# Altium PCB KBV1.3_mod.PcbDoc
Units mil, origin at the board's own origin, x right, y up, seen from the top; angles counter-clockwise.
Board outline 11250.06 x 3738.1 mil, 2 copper layers (Top Layer, Bottom Layer); 151 components, 147 nets, 722 pads, 52 vias.
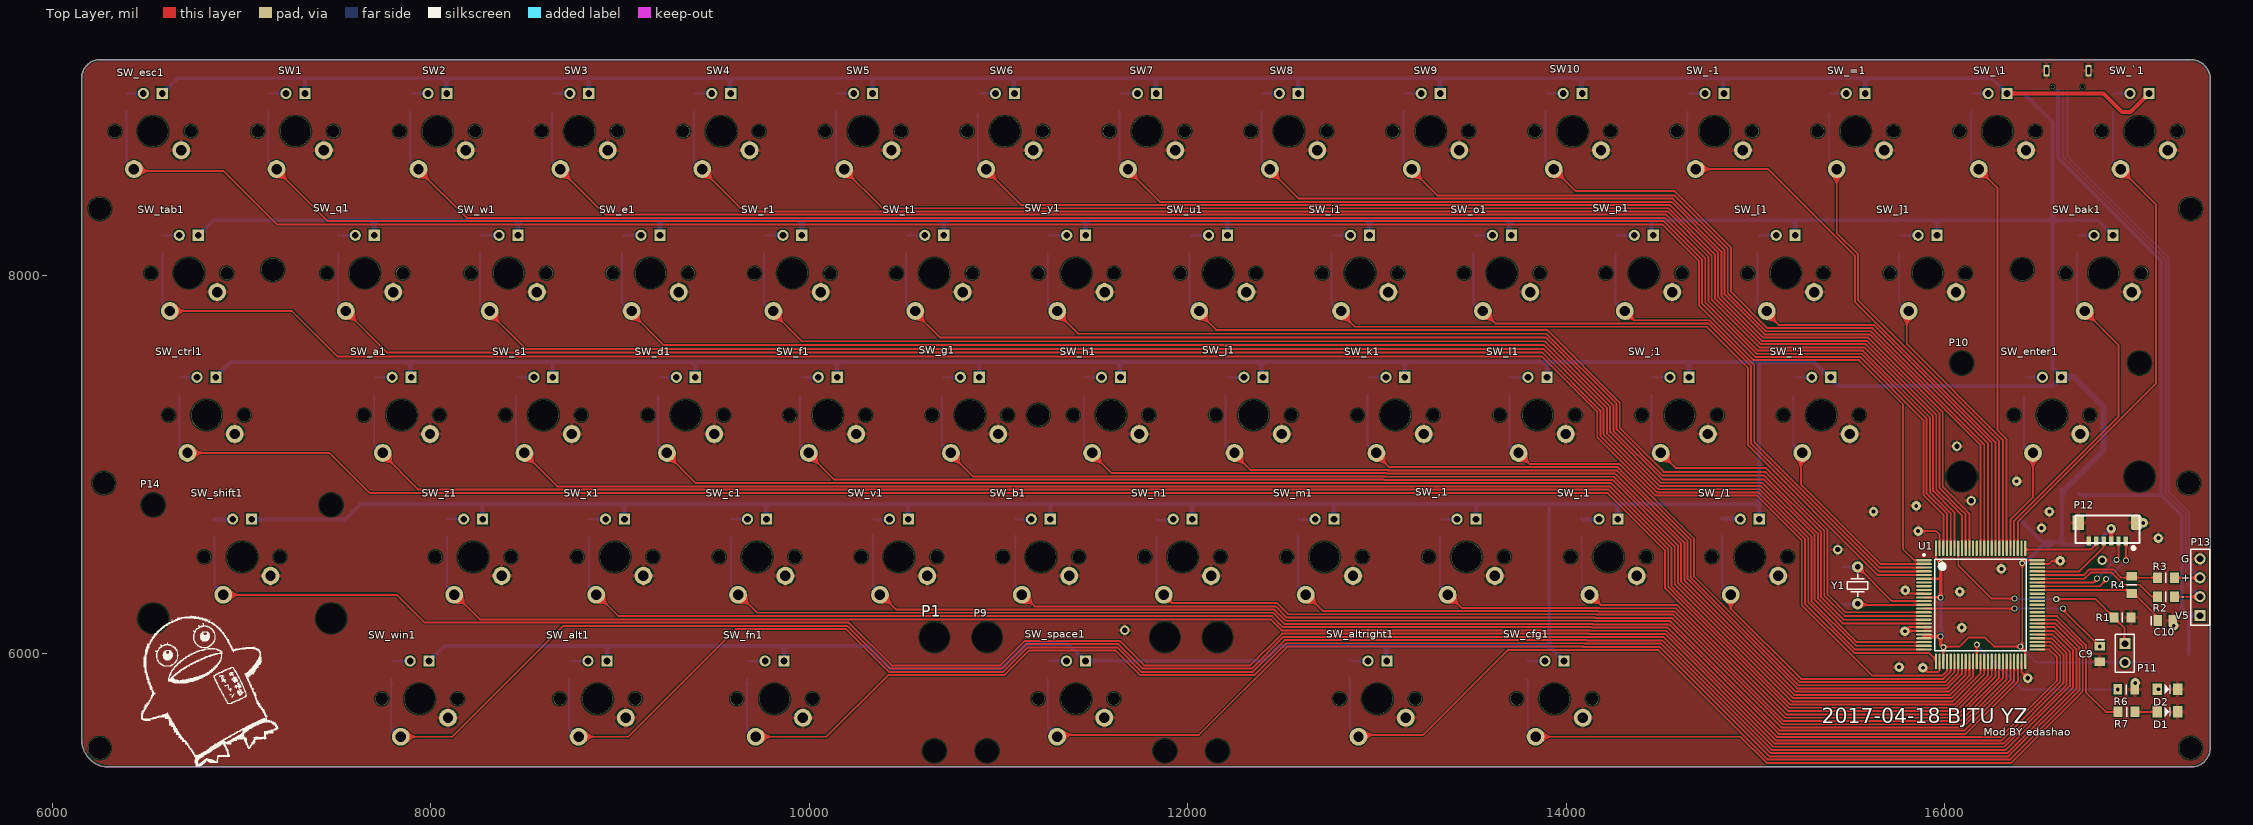
[diagram p0: Top Layer view]
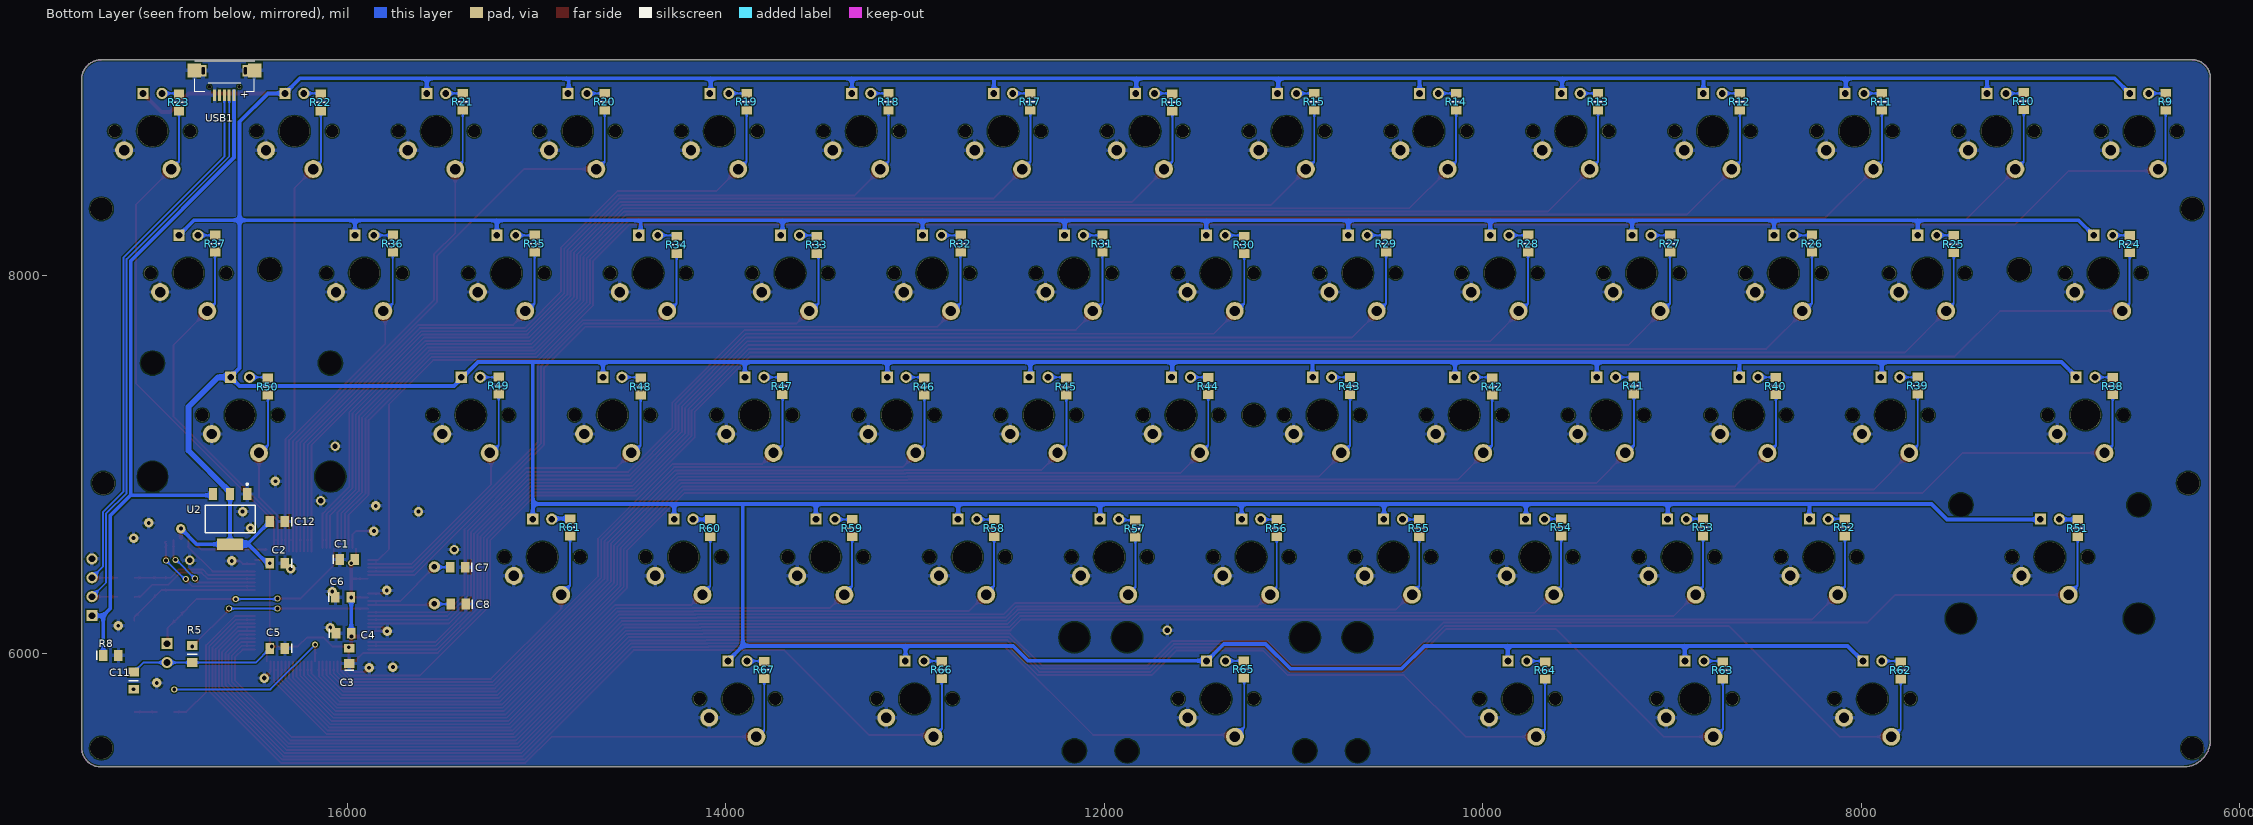
[diagram p1: Bottom Layer view, seen from below]

## Layer stack, top to bottom
Top Solder: solder mask 0.4, Solder Resist, Dk 3.5
Top Layer: signal copper 1.4
Dielectric1: dielectric 12.6, FR-4, Dk 4.8
Bottom Layer: signal copper 1.4
Bottom Solder: solder mask 0.4, Solder Resist, Dk 3.5

## Board outline
6154.04,5540 6154.04,9042.15 cw(c6250,9042.15) 6250,9138.1 17300,9138.1 cw(c17300,9034) 17404.1,9034 17404.1,5500 cw(c17302.05,5502.05) 17300,5400 6300,5400 cw(c6297.02,5542.98)

## Design rules (kind name [scope] priority, off if disabled: settings)
Clearance [All] p1: gap=7 ignorepadtopadclearanceinfootprint=FALSE except(0: Arc-Hole Track-Hole SMDPad-Hole THPad-Hole Via-Hole Fill-Hole Poly-Hole Region-Hole Text-Hole)
ComponentClearance [All] p1: gap=0 collisioncheckmode=3 verticalgap=0 showdistances=FALSE
HoleSize [All] p1: absolutevalues=TRUE maxlimit=300 minlimit=0 maxpercent=80.000 minpercent=20.000
MinimumSolderMaskSliver [All] p1: minsoldermaskwidth=1
PlaneConnect [All] p1: planeconnectstyle=Relief reliefexpansion=20 reliefentries=4 reliefconductorwidth=20 reliefairgap=10
PolygonConnect [All] p1: connectstyle=Relief reliefconductorwidth=20 reliefentries=4 polygonreliefangle="90 Angle" airgapwidth=10
RoutingVias [All] p1: holewidth=28 width=50 viastyle="Through Hole" minholewidth=2 minwidth=5 maxholewidth=280 maxwidth=500
SilkToSilkClearance [All] p1: silktosilkclearance=0
SilkToSolderMaskClearance SilkscreenOverComponentPads [IsPad] p1: minsilkscreentomaskgap=0 clearancetoexposedcopper=TRUE
SolderMaskExpansion [All] p1: expansion=4
Width [All] p1: maxlimit=1000 minlimit=10 preferedwidth=20 minimp=50.000000 maximp=50.000000 favimp=50.000000
24 further rules are at their usual default settings.

## Classes and differential pairs
component class main: P1 P9 P10 R9 R10 R11 R12 R13 R14 R15 R16 R17 R18 R19 R20 R21 R22 R23 R24 R25 R26 R27 R28 R29 R30 R31 R32 R33 R34 R35 R36 R37 R38 R39 R40 R41 R42 R43 R44 R45 R46 R47 R48 R49 R50 R51 R52 R53 R54 R55 R56 R57 R58 R59 R60 R61 R62 R63 R64 R65 R66 R67 SW1 SW2 SW3 SW4 SW5 SW6 SW7 SW8 SW9 SW10 "SW_\"1" SW_,1 SW_-1 SW_.1 SW_/1 SW_;1 SW_=1 SW_[1 SW_\1 SW_]1 SW_`1 SW_a1 SW_alt1 SW_altright1 SW_b1 SW_bak1 SW_c1 SW_cfg1 SW_ctrl1 SW_d1 SW_e1 SW_enter1 SW_esc1 SW_f1 SW_fn1 SW_g1 SW_h1 SW_i1 SW_j1 SW_k1 SW_l1 SW_m1 SW_n1 SW_o1 SW_p1 SW_q1 SW_r1 SW_s1 SW_shift1 SW_space1 SW_t1 SW_tab1 SW_u1 SW_v1 SW_w1 SW_win1 SW_x1 SW_y1 SW_z1
component class STM32F103VE: C1 C2 C3 C4 C5 C6 C7 C8 C9 C10 C11 C12 D1 D2 P11 P12 P13 R1 R2 R3 R4 R5 R6 R7 R8 U1 U2 USB1 Y1

## Components (designator, comment, footprint, x,y, rotation, side; value= is the part's Value field where it differs from the comment)
C1 "Cap" CAP0805(2512) 16000,6497 r180 bottom
C2 "Cap" CAP0805(2512) 16370,6477 r0 bottom
C3 "Cap" CAP0805(2512) 15990,5987 r90 bottom
C4 "Cap" CAP0805(2512) 16020,6107 r180 bottom
C5 "Cap" CAP0805(2512) 16370,6027 r0 bottom
C6 "Cap" CAP0805(2512) 16023,6297 r180 bottom
C7 "Cap" CAP0805(2512) 15417,6456 r0 bottom
C8 "Cap" CAP0805(2512) 15414,6261 r0 bottom
C9 "Cap" CAP0805(2512) 16820,5997 r270 top
C10 "Cap" CAP0805(2512) 17166,6174 r0 top
C11 "Cap Pol2" CAP0805(2512) 17250,5990 r180 bottom
C12 "Cap" CAP0805(2512) 16370,6697 r0 bottom
D1 "LED0" DIODE_100mil 17178,5691 r180 top
D2 "LED0" DIODE_100mil 17178,5811 r180 top
P1 "卫星轴" 1x3 11409,5760 r180 top
P9 "卫星轴" 1x2 11409,5760 r180 top
P10 "卫星轴" 1x2 16560,7260 r0 top
P11 "下载时暂时短路再上电" HDR1X2 16953,6052 r270 top
P12 "SH1.0-6P 立贴" SH1.0-6P立 16860,6640 r180 top
P13 "Header 4" HDR1X4 17350,6200 r90 top
P14 "卫星轴" 1x2 7002,6510 r0 top (schematic designator P9)
R1 "Res2" RES0805(2012M) 16940,6190 r0 top
R2 "Res Semi" RES0805(2012M) 17170,6300 r180 top
R3 "Res Semi" RES0805(2012M) 17170,6400 r180 top
R4 "Res Semi" RES0805(2012M) 16989,6363 r90 top
R5 "Res Semi" RES0805(2012M) 16820,5997 r90 bottom
R6 "Res2" RES0805(2012M) 16960,5810 r180 top
R7 "Res2" RES0805(2012M) 16962,5691 r0 top
R8 "Res2" RES0805(2012M) 17130,5856 r270 bottom
R9 "Res2" RES0805(2012M) 6390,8916 r270 bottom
R10 "Res2" RES0805(2012M) 7140,8919 r270 bottom
R11 "Res2" RES0805(2012M) 7890,8916 r270 bottom
R12 "Res2" RES0805(2012M) 8640,8916 r270 bottom
R13 "Res2" RES0805(2012M) 9390,8916 r270 bottom
R14 "Res2" RES0805(2012M) 10140,8916 r270 bottom
R15 "Res2" RES0805(2012M) 10890,8916 r270 bottom
R16 "Res2" RES0805(2012M) 11640,8913 r270 bottom
R17 "Res2" RES0805(2012M) 12390,8916 r270 bottom
R18 "Res2" RES0805(2012M) 13140,8916 r270 bottom
R19 "Res2" RES0805(2012M) 13890,8916 r270 bottom
R20 "Res2" RES0805(2012M) 14640,8916 r270 bottom
R21 "Res2" RES0805(2012M) 15390,8916 r270 bottom
R22 "Res2" RES0805(2012M) 16140,8913 r270 bottom
R23 "Res2" RES0805(2012M) 16890,8913 r90 bottom
R24 "Res2" RES0805(2012M) 6579,8163 r270 bottom
R25 "Res2" RES0805(2012M) 7509,8163 r270 bottom
R26 "Res2" RES0805(2012M) 8259,8166 r270 bottom
R27 "Res2" RES0805(2012M) 9009,8166 r270 bottom
R28 "Res2" RES0805(2012M) 9759,8166 r270 bottom
R29 "Res2" RES0805(2012M) 10509,8166 r270 bottom
R30 "Res2" RES0805(2012M) 11260,8160 r270 bottom
R31 "Res2" RES0805(2012M) 12009,8166 r270 bottom
R32 "Res2" RES0805(2012M) 12759,8166 r270 bottom
R33 "Res2" RES0805(2012M) 13520,8160 r270 bottom
R34 "Res2" RES0805(2012M) 14260,8160 r270 bottom
R35 "Res2" RES0805(2012M) 15009,8166 r270 bottom
R36 "Res2" RES0805(2012M) 15759,8166 r270 bottom
R37 "Res2" RES0805(2012M) 16698,8166 r270 bottom
R38 "Res2" RES0805(2012M) 6669,7413 r270 bottom
R39 "Res2" RES0805(2012M) 7701,7416 r270 bottom
R40 "Res2" RES0805(2012M) 8451,7413 r270 bottom
R41 "Res2" RES0805(2012M) 9201,7416 r270 bottom
R42 "Res2" RES0805(2012M) 9950,7410 r270 bottom
R43 "Res2" RES0805(2012M) 10701,7413 r270 bottom
R44 "Res2" RES0805(2012M) 11451,7413 r270 bottom
R45 "Res2" RES0805(2012M) 12200,7410 r270 bottom
R46 "Res2" RES0805(2012M) 12950,7410 r270 bottom
R47 "Res2" RES0805(2012M) 13701,7413 r270 bottom
R48 "Res2" RES0805(2012M) 14450,7410 r270 bottom
R49 "Res2" RES0805(2012M) 15201,7416 r270 bottom
R50 "Res2" RES0805(2012M) 16420,7410 r270 bottom
R51 "Res2" RES0805(2012M) 6855,6663 r270 bottom
R52 "Res2" RES0805(2012M) 8085,6666 r270 bottom
R53 "Res2" RES0805(2012M) 8835,6666 r270 bottom
R54 "Res2" RES0805(2012M) 9585,6666 r270 bottom
R55 "Res2" RES0805(2012M) 10335,6663 r270 bottom
R56 "Res2" RES0805(2012M) 11088,6663 r270 bottom
R57 "Res2" RES0805(2012M) 11835,6660 r270 bottom
R58 "Res2" RES0805(2012M) 12582,6663 r270 bottom
R59 "Res2" RES0805(2012M) 13332,6663 r270 bottom
R60 "Res2" RES0805(2012M) 14082,6663 r270 bottom
R61 "Res2" RES0805(2012M) 14823,6666 r270 bottom
R62 "Res2" RES0805(2012M) 7790,5910 r270 bottom
R63 "Res2" RES0805(2012M) 8730,5910 r270 bottom
R64 "Res2" RES0805(2012M) 9670,5910 r270 bottom
R65 "Res2" RES0805(2012M) 11262,5916 r270 bottom
R66 "Res2" RES0805(2012M) 12858,5913 r270 bottom
R67 "Res2" RES0805(2012M) 13797,5913 r270 bottom
SW1 "" MX_SW-5 7284,8760 r0 top
SW2 "" MX_SW-5 8034,8760 r0 top
SW3 "" MX_SW-5 8784,8760 r0 top
SW4 "" MX_SW-5 9534,8760 r0 top
SW5 "" MX_SW-5 10284,8760 r0 top
SW6 "" MX_SW-5 11034,8760 r0 top
SW7 "" MX_SW-5 11784,8760 r0 top
SW8 "" MX_SW-5 12534,8760 r0 top
SW9 "" MX_SW-5 13284,8760 r0 top
SW10 "" MX_SW-5 14034,8760 r0 top
"SW_\"1" "" MX_SW-5 15348,7260 r0 top
SW_,1 "" MX_SW-5 13473,6510 r0 top
SW_-1 "" MX_SW-5 14784,8760 r0 top
SW_.1 "" MX_SW-5 14223,6510 r0 top
SW_/1 "" MX_SW-5 14970,6510 r0 top
SW_;1 "" MX_SW-5 14599,7260 r0 top
SW_=1 "" MX_SW-5 15530,8760 r0 top
SW_[1 "" MX_SW-5 15160,8010 r0 top
SW_\1 "" MX_SW-5 16280,8760 r0 top
SW_]1 "" MX_SW-5 15910,8010 r0 top
SW_`1 "" MX_SW-5 17030,8760 r0 top
SW_a1 "" MX_SW-5 7845,7260 r0 top
SW_alt1 "" MX_SW-5 8880,5760 r0 top
SW_altright1 "" MX_SW-5 13002,5760 r0 top
SW_b1 "" MX_SW-5 11223,6510 r0 top
SW_bak1 "" MX_SW-5 16840,8010 r0 top
SW_c1 "" MX_SW-5 9723,6510 r0 top
SW_cfg1 "" MX_SW-5 13938,5760 r0 top
SW_ctrl1 "" MX_SW-5 6813,7260 r0 top
SW_d1 "" MX_SW-5 9347,7260 r0 top
SW_e1 "" MX_SW-5 9160,8010 r0 top
SW_enter1 "" MX_SW-5 16567,7260 r0 top
SW_esc1 "" MX_SW-5 6530,8760 r0 top
SW_f1 "" MX_SW-5 10097,7260 r0 top
SW_fn1 "" MX_SW-5 9816,5760 r0 top
SW_g1 "" MX_SW-5 10848,7260 r0 top
SW_h1 "" MX_SW-5 11594,7260 r0 top
SW_i1 "" MX_SW-5 12910,8010 r0 top
SW_j1 "" MX_SW-5 12347,7260 r0 top
SW_k1 "" MX_SW-5 13097,7260 r0 top
SW_l1 "" MX_SW-5 13848,7260 r0 top
SW_m1 "" MX_SW-5 12723,6510 r0 top
SW_n1 "" MX_SW-5 11973,6510 r0 top
SW_o1 "" MX_SW-5 13660,8010 r0 top
SW_p1 "" MX_SW-5 14410,8010 r0 top
SW_q1 "" MX_SW-5 7650,8010 r0 top
SW_r1 "" MX_SW-5 9910,8010 r0 top
SW_s1 "" MX_SW-5 8594,7260 r0 top
SW_shift1 "" MX_SW-5 7002,6510 r0 top
SW_space1 "" MX_SW-5 11409,5760 r0 top
SW_t1 "" MX_SW-5 10660,8010 r0 top
SW_tab1 "" MX_SW-5 6720,8010 r0 top
SW_u1 "" MX_SW-5 12160,8010 r0 top
SW_v1 "" MX_SW-5 10473,6510 r0 top
SW_w1 "" MX_SW-5 8410,8010 r0 top
SW_win1 "" MX_SW-5 7940,5760 r0 top
SW_x1 "" MX_SW-5 8973,6510 r0 top
SW_y1 "" MX_SW-5 11410,8010 r0 top
SW_z1 "" MX_SW-5 8223,6510 r0 top
U1 "STM32F103VET6" LQFP-100 16190,6257 r0 top locked
U2 "REG1117-3.3" ZZ311 16620,6710 r0 bottom
USB1 "USB" MICRO-USB 16650,9060 r0 bottom
Y1 "XTAL" XTAL_0.4 15540,6360 r90 top

## Footprints (in the part's own frame and the unit in brackets; to place one, negate y for a bottom-side part, rotate by r counter-clockwise, add the part's x,y. Pads: shape width x height; smd on the part's side, far side on the other; paste and mask are expansions set on the pad)
1x2 [mil]
  round 0 hole 120: 0(-470,275) 3(470,275)
  round 0 hole 157: 1(-470,-325) 4(470,-325)
1x3 [mil]
  round 0 hole 120: 0(-748.03,275) 3(748.03,275)
  round 0 hole 157: 1(-748.03,-325) 4(748.03,-325)
CAP0805(2512) [mm]
  rect 1.15x1.45 smd: 1(-1.016,0) 2(1.016,0)
  silkscreen extent -1.9,-0.6 -1.9,0.6, body extent -1.1,-0.72 1.1,0.72, height 1.4
DIODE_100mil [mil]
  rect 50x60 smd: 1(53.15,0) 2(-53.15,0)
  silkscreen extent -15,-25 15,25, body extent -67,-35 67,35, height 22
HDR1X2 [mm] "Connector; Header; 2 Position"
  rect 1.5x1.5 hole 0.9: 1(0,0)
  round 1.5 hole 0.9: 2(2.54,0)
  silkscreen extent -1.27,-1.27 3.81,1.27
HDR1X4 [mm] "Connector; Header; 4 Position"
  rect 1.5x1.5 hole 0.9: 1(0,0)
  round 1.5 hole 0.9: 2(2.54,0) 3(5.08,0) 4(7.62,0)
  silkscreen extent -1.27,-1.27 8.89,1.27
LQFP-100 [mm] "100-Pin Thin Quad Flat Pack 0.5 mm Pitch, IPC Low Density"
  oval 2.1x0.3 smd: 1(-7.6,6) 2(-7.6,5.5) 3(-7.6,5) 4(-7.6,4.5) 5(-7.6,4) 6(-7.6,3.5) 7(-7.6,3) 8(-7.6,2.5) 9(-7.6,2) 10(-7.6,1.5) 11(-7.6,1) 12(-7.6,0.5) 13(-7.6,0) 14(-7.6,-0.5) 15(-7.6,-1) 16(-7.6,-1.5) 17(-7.6,-2) 18(-7.6,-2.5) 19(-7.6,-3) 20(-7.6,-3.5) 21(-7.6,-4) 22(-7.6,-4.5) 23(-7.6,-5) 24(-7.6,-5.5) 25(-7.6,-6) 51(7.6,-6) 52(7.6,-5.5) 53(7.6,-5) 54(7.6,-4.5) 55(7.6,-4) 56(7.6,-3.5) 57(7.6,-3) 58(7.6,-2.5) 59(7.6,-2) 60(7.6,-1.5) 61(7.6,-1) 62(7.6,-0.5) 63(7.6,0) 64(7.6,0.5) 65(7.6,1) 66(7.6,1.5) 67(7.6,2) 68(7.6,2.5) 69(7.6,3) 70(7.6,3.5) 71(7.6,4) 72(7.6,4.5) 73(7.6,5) 74(7.6,5.5) 75(7.6,6)
  oval 0.3x2.1 smd: 26(-6,-7.6) 27(-5.5,-7.6) 28(-5,-7.6) 29(-4.5,-7.6) 30(-4,-7.6) 31(-3.5,-7.6) 32(-3,-7.6) 33(-2.5,-7.6) 34(-2,-7.6) 35(-1.5,-7.6) 36(-1,-7.6) 37(-0.5,-7.6) 38(0,-7.6) 39(0.5,-7.6) 40(1,-7.6) 41(1.5,-7.6) 42(2,-7.6) 43(2.5,-7.6) 44(3,-7.6) 45(3.5,-7.6) 46(4,-7.6) 47(4.5,-7.6) 48(5,-7.6) 49(5.5,-7.6) 50(6,-7.6) 76(6,7.6) 77(5.5,7.6) 78(5,7.6) 79(4.5,7.6) 80(4,7.6) 81(3.5,7.6) 82(3,7.6) 83(2.5,7.6) 84(2,7.6) 85(1.5,7.6) 86(1,7.6) 87(0.5,7.6) 88(0,7.6) 89(-0.5,7.6) 90(-1,7.6) 91(-1.5,7.6) 92(-2,7.6) 93(-2.5,7.6) 94(-3,7.6) 95(-3.5,7.6) 96(-4,7.6) 97(-4.5,7.6) 98(-5,7.6) 99(-5.5,7.6) 100(-6,7.6)
  silkscreen extent -7.72,-6.15 6.15,6.82, body extent -7,-5.98 7,8.02, height 1.05
MICRO-USB [mm]
  rect 0.4x1.55 smd: 1(-1.3,2.794) 2(-0.65,2.794) 3(0,2.794) 4(0.65,2.794) 5(1.3,2.794)
  rect 1.8x1.9 smd: 6(-4.05,-0.55) 6(4.05,-0.55)
  rect 0.8x1.5 hole 0.4 slot 1 at 90 deg: 6(-2.825,-0.5) 6(2.825,-0.5)
  round 0.5 hole 0.5 unplated: ""(-2,1.65) ""(2,1.65)
  silkscreen extent -4.05,-1.8 4,2.3
MX_SW-5 [mm] "with Fixation pins  1-Pole w/LED"
  round 2.4 hole 1.4: 1(3.81,-2.54) 2(-2.54,-5.08)
  rect 1.5x1.5 hole 0.9: 3(1.27,5.08)
  round 1.5 hole 0.9: 4(-1.27,5.08)
  round 1.702 hole 1.702: ""(-5.08,0) ""(5.08,0)
  round 4.064 hole 4.064: ""(0,0)
RES0805(2012M) [mm]
  rect 1.2x1.4 smd: 1(-1.143,0) 2(1.143,0)
  silkscreen extent 0,-0.65 0,0.65, body extent -1.07,-0.7 1.07,0.7, height 0.7
SH1.0-6P立 [mm]
  rrect50% 1.5x2 smd: 0(-3.9,-1.286)
  rect 1.5x2 smd: 0(3.9,-1.286)
  rect 0.6x1.2 smd: 1(-2.5,1.186) 2(-1.5,1.186) 3(-0.5,1.186) 4(0.5,1.186) 5(1.5,1.186) 6(2.5,1.186)
  silkscreen extent -4.3,-2.29 4.28,2.27, body extent -4,-2.02 4,1.58, height 4.3
XTAL_0.4 [mil]
  round 60 hole 30: 1(97.5,0) 2(-97.5,0)
  silkscreen extent -60,-55 60,55, body extent -236,-87 236,87, height 150
ZZ311 [mm] "SOT-223/SC-73; 4 Leads; Body 6.7 x 7.3 mm, inc. leads (LxW max)"
  rect 1.1x1.55 smd: 1(-2.3,-3.375) 2(0,-3.375) 3(2.3,-3.375)
  rect 3.45x1.55 smd: 4(0,3.375)
  silkscreen extent -3.35,-4.82 3.35,1.85

## Part data
C1 C2 C3 C4 C5 C6 C7 C8 C9 C10 C12: "Capacitor"
C11: "Polarized Capacitor (Axial)"
D1 D2: "Typical INFRARED GaAs LED"
P1: library part "Header 2", "Header,"
P9 P10 P14: library part "Header 2", "Hea"
P11: library part "Header 2", "Header, 2-Pin"
P12: library part "Header 7", "Header, 7-Pin"
P13: "Header, 4-Pin"
R1 R6 R7 R8 R9 R10 R11 R12 R13 R14 R15 R16 R17 R18 R19 R20 R21 R22 R23 R24 R25 R26 R27 R28 R29 R30 R31 R32 R33 R34 R35 R36 R37 R38 R39 R40 R41 R42 R43 R44 R45 R46 R47 R48 R49 R50 R51 R52 R53 R54 R55 R56 R57 R58 R59 R60 R61 R62 R63 R64 R65 R66 R67: "Resistor"
R2 R3 R4 R5: "Semiconductor Resistor"
SW1 SW2 SW3 SW4 SW5 SW6 SW7 SW8 SW9 SW10 "SW_\"1" SW_,1 SW_-1 SW_.1 SW_/1 SW_;1 SW_=1 SW_[1 SW_\1 SW_]1 SW_`1 SW_a1 SW_alt1 SW_altright1 SW_b1 SW_bak1 SW_c1 SW_cfg1 SW_ctrl1 SW_d1 SW_e1 SW_enter1 SW_esc1 SW_f1 SW_fn1 SW_g1 SW_h1 SW_i1 SW_j1 SW_k1 SW_l1 SW_m1 SW_n1 SW_o1 SW_p1 SW_q1 SW_r1 SW_s1 SW_shift1 SW_space1 SW_t1 SW_tab1 SW_u1 SW_v1 SW_w1 SW_win1 SW_x1 SW_y1 SW_z1: library part MX_SW-5, "with Fixation pins  1-Pole w/LED"
U1: library part STM32F103VBT6, "STM32 ARM-based 32-bit MCU with 64 Kbytes Flash, 100-pin LQFP, Industrial Temperature"
U2: "800mA and 1A Low Dropout Positive Regulator 2.85V, 3.3V, 5V, and Adjustable"
Y1: "Crystal Oscillator"

## Via types
v1: diameter 50, hole 20, Top Layer to Bottom Layer, 19 vias
v2: diameter 32, hole 20, Top Layer to Bottom Layer, 18 vias
v3: diameter 118.11, hole 118.11, Top Layer to Bottom Layer, 9 vias
v4: diameter 50, hole 28, Top Layer to Bottom Layer, 5 vias
v5: diameter 50, hole 25, Top Layer to Bottom Layer, 1 vias

## Nets (pads, with @x,y where several pads share a name; then routed paths per layer and width w, separated by ;. In a path a pad name is that pad's centre, name@x,y a point inside that pad or via, vN(x,y) a via of type N, cw(c..) or ccw(c..) an arc to the next point about the centre after c; other vN are vias at no path point)
BOOT0: P11.1 R1.1 U1.94 | length 1187.4
  Top Layer w10: U1.94 16071.89,6467.11 16249,6290 v2(16370,6290) ; v2(16590,6287) 16799,6287 ; 16799,6286 R1.1 16950,6135 P11.1@16950,6052
  Bottom Layer w10: v2(16370,6290) 16373,6287 v2(16590,6287)
BOOT1: R6.2 U1.37 | length 941.6
  Top Layer w10: v2@16170,6037 v2(16170,6046.37) 16170.32,6046.69 U1.37
  Bottom Layer w10: v2(16170,6046.37) 16406.37,5810 v2(16915,5810)
BT1: R10.2 SW1.2 U1.98 | length 10448.4
  Top Layer w10: SW1.2@7175,8555 7185,8555 7455,8285 14514.63,8285 14718,8081.63 14718,7848.17 14999.17,7567 15554.04,7567 15888,7233.04 15888,6837.75 15897.96,6827.79 15898.17,6827.79 15993.15,6732.81 U1.98
  Bottom Layer w10: R10.2 7140,8600 SW1.2@7180,8560
BT2: R11.2 SW2.2 U1.97 | length 9708.7
  Top Layer w10: SW2.2@7930,8560 8188,8302 14521.67,8302 14735,8088.67 14735,7855.21 15006.21,7584 15561.08,7584 15905,7240.08 15905,6844.79 ; 15905.1,6844.9 16012.83,6737.17 U1.97
  Bottom Layer w10: R11.2@7890,8865 7890,8600 SW2.2@7930,8560
BT3: R12.2 SW3.2 U1.96 | length 8980.8
  Top Layer w10: SW3.2@8680,8560 8921,8319 14528.71,8319 14752,8095.71 14752,7862.25 15013.25,7601 15568.12,7601 15922,7247.12 15922,6852.04 16029.83,6744.21 16029.83,6744 16032.52,6741.31 U1.96
  Bottom Layer w10: R12.2@8640,8865 8640,8600 SW3.2@8680,8560
BT4: R13.2 SW4.2 U1.95 | length 8253.1
  Top Layer w10: SW4.2@9430,8560 9654,8336 14535.75,8336 14769,8102.75 14769,7869.29 15020.29,7618 15575.17,7618 15939,7254.17 15939,6859.08 16046.83,6751.25 16046.83,6751.04 16052.2,6745.67 U1.95
  Bottom Layer w10: R13.2@9390,8865 9390,8600 SW4.2@9430,8560
BT5: R14.2 SW5.2 U1.93 | length 7533.5
  Top Layer w10: SW5.2@10180,8560 10387,8353 14542.79,8353 14786,8109.79 14786,7876.33 15027.33,7635 15582.21,7635 15956,7261.21 15956,6866.12 16063.83,6758.29 16063.83,6758.08 16091.57,6730.34 U1.93
  Bottom Layer w10: R14.2@10140,8865 10140,8600 SW5.2@10180,8560
BT6: R15.2 SW6.2 U1.92 | length 6805.7
  Top Layer w10: SW6.2@10930,8560 11120,8370 14549.83,8370 14803,8116.83 14803,7883.37 15034.37,7652 15589.25,7652 15973,7268.25 15973,6873.17 16080.83,6765.33 16080.83,6765.12 16111.26,6734.7 U1.92
  Bottom Layer w10: R15.2@10890,8865 10890,8600 SW6.2@10930,8560
BT7: R16.2 SW7.2 U1.91 | length 6077.9
  Top Layer w10: SW7.2@11680,8560 11853,8387 14556.88,8387 14820,8123.88 14820,7890.42 15041.42,7669 15596.29,7669 15990,7275.29 15990,6880.21 16097.83,6772.37 16097.83,6772.17 16130.94,6739.06 U1.91
  Bottom Layer w10: R16.2@11640,8865 11640,8600 SW7.2@11680,8560
BT8: R17.2 SW8.2 U1.88 | length 5383.5
  Top Layer w10: SW8.2@12430,8560 12586,8404 14563.92,8404 14837,8130.92 14837,7897.46 15048.46,7686 15603.33,7686 16190,7099.33 U1.88 U1.88@16190,6539.21
  Bottom Layer w10: R17.2@12390,8865 12390,8600 SW8.2@12430,8560
BT9: R18.2 SW9.2 U1.87 | length 4656
  Top Layer w10: SW9.2@13180,8560 13319,8421 14570.96,8421 14854,8137.96 14854,7904.5 15055.5,7703 15610.83,7703 16209.68,7104.15 U1.87 U1.87@16209.68,6539.21
  Bottom Layer w10: R18.2@13140,8865 13140,8600 SW9.2@13180,8560
BT10: R19.2 SW10.2 U1.86 | length 3928.2
  Top Layer w10: SW10.2@13930,8560 SW10.2 14049,8445 14571,8445 14871,8145 14871,7911.54 15062.54,7720 15617.88,7720 16229.37,7108.51 U1.86 U1.86@16229.37,6539.21
  Bottom Layer w10: R19.2@13890,8865 13890,8600 SW10.2@13930,8560
"BT\"": "SW_\"1.2" R49.2 U1.2 | length 1312.5
  Top Layer w10: 15240,7060 15240,6894 15660.46,6473.54 U1.2
  Bottom Layer w10: R49.2@15200,7365 15200,7100 15240,7060
BT,: R59.2 SW_,1.2 U1.43 | length 3685.4
  Top Layer w10: 13373,6316 13448,6241 14174.58,6241 14176.58,6239 14578.58,6239 15157.65,5659.93 16075.72,5659.93 16288.43,5872.63 U1.43
  Bottom Layer w10: R59.2@13332,6624 R59.2 13332,6357 13373,6316
BT-: R20.2 SW_-1.2 U1.84 | length 3227.7
  Top Layer w10: SW_-1.2@14680,8560 SW_-1.2 15067.96,8560 15526,8101.96 15526,7859.96 16268.74,7117.22 U1.84 U1.84@16268.74,6539.21
  Bottom Layer w10: R20.2@14640,8865 14640,8600 SW_-1.2@14680,8560
BT.: R60.2 SW_.1.2 U1.42 | length 2899.1
  Top Layer w10: SW_.1.2@14123,6316 14123.62,6316 14183.62,6256 14585.62,6256 15164.7,5676.93 16068.68,5676.93 16268.74,5876.99 U1.42
  Bottom Layer w10: R60.2@14082,6624 R60.2 14082,6357 SW_.1.2@14123,6316
BT/: R61.2 SW_/1.2 U1.30 | length 1791.4
  Top Layer w10: SW_/1.2@14870,6313 SW_/1.2 14870,6237.2 15241.2,5866 15993.29,5866 16032.52,5905.23 U1.30
  Bottom Layer w10: R61.2@14823,6624 R61.2 14823,6360 SW_/1.2@14870,6313
BT;: R48.2 SW_;1.2 U1.15 | length 2271.8
  Top Layer w10: 14490,7060 14499,7060 14578,6981 15054.33,6981 15381,6654.33 15381,6312 15475.37,6217.63 U1.15
  Bottom Layer w10: R48.2 14450,7100 14490,7060
BT=: R21.2 SW_=1.2 U1.83 | length 2697.9
  Top Layer w10: SW_=1.2 15430,8222 15543,8109 15543,7867 16288.43,7121.57 U1.83 U1.83@16288.43,6539.21
  Bottom Layer w10: R21.2@15390,8865 15390,8600 SW_=1.2
BT[: R35.2 SW_[1.2 U1.85 | length 2383
  Top Layer w10: SW_[1.2@15050,7810 15123,7737 15624.92,7737 16249.06,7112.86 U1.85 U1.85@16249.06,6539.21
  Bottom Layer w10: R35.2@15010,8115 15010,7850 SW_[1.2@15050,7810
BT]: R36.2 SW_]1.2 U1.82 | length 1802.8
  Top Layer w10: SW_]1.2@15800,7810 15800,7635.96 16308.11,7127.85 U1.82 U1.82@16308.11,6539.21
  Bottom Layer w10: R36.2@15760,8115 15760,7850 SW_]1.2@15800,7810
BT_?: R22.2 SW_\1.2 U1.81 | length 2403.6
  Top Layer w10: SW_\1.2 16280,8460 16280,7180 16327.8,7132.2 U1.81 U1.81@16327.8,6539.21
  Bottom Layer w10: R22.2@16140,8865 16140,8600 SW_\1.2
BT`: R23.1 SW_`1.2 U1.78 | length 2706.1
  Top Layer w10: U1.78 16386.85,6696.77 17118,7427.92 17118,8372 SW_`1.2
  Bottom Layer w10: R23.1@16890,8865 16890,8600 SW_`1.2
BTA: R39.2 SW_a1.2 U1.40 | length 9629.2
  Top Layer w10: SW_a1.2@7740,7060 7934,6866 14224.04,6866 14539.39,6550.65 14539.39,6351.43 15177.83,5713 16056.67,5713 16229.37,5885.7 U1.40
  Bottom Layer w10: R39.2@7700,7365 7700,7100 SW_a1.2@7740,7060
BTALT: R63.2 SW_alt1.2 U1.55 | length 9490.9
  Top Layer w10: SW_alt1.2@8770,5560 SW_alt1.2 9043,5560 9612,6129 10194,6129 10420,5903 11023.96,5903 11152.96,6032 11626.04,6032 11755.04,5903 12344.08,5903 12512.08,6071 14104.17,6071 14106.17,6069 14508.17,6069 15087.24,5489.93 16323.1,5489.93 16662,5828.83 16662,6009.17 16571.65,6099.52 U1.55
  Bottom Layer w10: R63.2 8730,5600 SW_alt1.2@8770,5560
BTALTRIGHT: R66.2 SW_altright1.2 U1.58 | length 5222.3
  Top Layer w10: SW_altright1.2@12890,5570 13244,5570 13692,6018 14487.04,6018 15066.11,5438.93 16344.22,5438.93 16713,5807.71 16713,6030.29 16584.72,6158.57 U1.58
  Bottom Layer w10: R66.2@12850,5875 12858,5867 12858,5602 SW_altright1.2@12890,5570
BTB: R56.2 SW_b1.2 U1.46 | length 6041.9
  Top Layer w10: SW_b1.2@11123,6316 11190,6249 12465.17,6249 12524.17,6190 14153.46,6190 14155.46,6188 14557.46,6188 15136.53,5608.93 16096.85,5608.93 16347.48,5859.56 U1.46
  Bottom Layer w10: R56.2@11088,6624 R56.2 11088,6351 SW_b1.2@11123,6316
BTBAK: R37.2 SW_bak1.2 U1.79 | length 1878.9
  Top Layer w10: U1.79 16367.17,6701.12 16920,7253.96 16920,7630 SW_bak1.2
  Bottom Layer w10: R37.2@16700,8115 16700,7850 SW_bak1.2
BTC: R54.2 SW_c1.2 U1.48 | length 7612.8
  Top Layer w10: SW_c1.2@9623,6316 9724,6215 12451.08,6215 12510.08,6156 14139.37,6156 14141.37,6154 14543.37,6154 15122.45,5574.93 16110.93,5574.93 16386.85,5850.85 U1.48
  Bottom Layer w10: R54.2 9585,6354 SW_c1.2@9623,6316
BTCFG: R67.2 SW_cfg1.2 U1.59 | length 3971.5
  Top Layer w10: SW_cfg1.2@13830,5560 SW_cfg1.2 14921,5560 15059.07,5421.93 16351.26,5421.93 16730,5800.67 16730,6037.33 16589.07,6178.26 U1.59
  Bottom Layer w10: R67.2@13790,5865 13797,5858 13797,5593 SW_cfg1.2@13830,5560
BTCTRL: R38.2 SW_ctrl1.2 U1.41 | length 10695.5
  Top Layer w10: SW_ctrl1.2@6710,7060 SW_ctrl1.2 7463,7060 7674,6849 14217,6849 14522.39,6543.61 14522.39,6344.39 15170.78,5696 16063.71,5696 16249.06,5881.35 U1.41
  Bottom Layer w10: R38.2@6670,7365 6670,7100 SW_ctrl1.2@6710,7060
BTD: R41.2 SW_d1.2 U1.38 | length 8056.6
  Top Layer w10: SW_d1.2@9240,7060 9400,6900 14238.12,6900 14573.39,6564.73 14573.39,6365.52 15191.91,5747 16042.58,5747 16190,5894.42 U1.38
  Bottom Layer w10: R41.2@9200,7365 9200,7100 SW_d1.2@9240,7060
BTE: R27.2 SW_e1.2 U1.24 | length 8174.5
  Top Layer w10: SW_e1.2@9050,7810 9230,7630 13882.75,7630 14215,7297.75 14215,7163.54 14493.54,6885 15030.12,6885 15296,6619.12 15296,6276.79 15532.33,6040.46 U1.24
  Bottom Layer w10: R27.2@9010,8115 9010,7850 SW_e1.2@9050,7810
BTENTER: R50.2 SW_enter1.2 U1.80 | length 877.8
  Top Layer w10: U1.80 16347.48,6705.48 16467,6825 16467,7053 SW_enter1.2@16460,7060
  Bottom Layer w10: R50.2 16420,7100 SW_enter1.2@16460,7060
BTESC: R9.2 SW_esc1.2 U1.1 | length 11229.2
  Top Layer w10: SW_esc1.2@6420,8550 6903,8550 7185,8268 14507.58,8268 14701,8074.58 14701,7841.12 14992.12,7550 15547,7550 15780,7317 15780,6552 15838.78,6493.22 U1.1
  Bottom Layer w10: R9.2@6390,8865 6390,8600 SW_esc1.2
BTF: R42.2 SW_f1.2 U1.36 | length 7262.1
  Top Layer w10: SW_f1.2@9990,7060 10131,6919 13034.83,6919 13036.83,6917 14245.17,6917 14590.39,6571.77 14590.39,6372.56 15198.95,5764 16035.54,5764 16150.63,5879.09 U1.36
  Bottom Layer w10: R42.2 9950,7100 SW_f1.2@9990,7060
BTFN: R64.2 SW_fn1.2 U1.56 | length 8414.1
  Top Layer w10: SW_fn1.2@9710,5560 SW_fn1.2 10090,5560 10416,5886 11031,5886 11160,6015 11619,6015 11748,5886 12351.12,5886 12519.12,6054 14097.12,6054 14099.12,6052 14501.12,6052 15080.2,5472.93 16330.14,5472.93 16679,5821.79 16679,6016.21 16576,6119.2 U1.56
  Bottom Layer w10: R64.2 9670,5600 SW_fn1.2@9710,5560
BTG: R43.2 SW_g1.2 U1.35 | length 6475.8
  Top Layer w10: SW_g1.2@10740,7060 10864,6936 13041.88,6936 13043.88,6934 14252.21,6934 14607.39,6578.82 14607.39,6379.6 15205.99,5781 16028.5,5781 16130.94,5883.44 U1.35
  Bottom Layer w10: R43.2@10700,7365 10700,7100 SW_g1.2@10740,7060
BTH: R44.2 SW_h1.2 U1.34 | length 5689.4
  Top Layer w10: SW_h1.2@11490,7060 11597,6953 13048.92,6953 13050.92,6951 14259.25,6951 14624.39,6585.86 14624.39,6386.64 15213.03,5798 16021.46,5798 16111.26,5887.8 U1.34
  Bottom Layer w10: R44.2@11450,7365 11450,7100 SW_h1.2@11490,7060
BTI: R32.2 SW_i1.2 U1.5 | length 4229.5
  Top Layer w10: SW_i1.2@12800,7810 12883,7727 14743,7727 14960,7510 14960,7101.88 15647.39,6414.48 U1.5
  Bottom Layer w10: R32.2@12760,8115 12760,7850 SW_i1.2@12800,7810
BTJ: R45.2 SW_j1.2 U1.33 | length 4903.1
  Top Layer w10: SW_j1.2@12240,7060 12330,6970 13055.96,6970 13057.96,6968 14266.29,6968 14641.39,6592.9 14641.39,6393.68 15220.08,5815 16014.42,5815 16091.57,5892.16 U1.33
  Bottom Layer w10: R45.2 12200,7100 SW_j1.2@12240,7060
BTK: R46.2 SW_k1.2 U1.32 | length 4116.8
  Top Layer w10: SW_k1.2@12990,7060 13065,6985 14273.33,6985 14658.39,6599.94 14658.39,6400.72 15227.12,5832 16007.38,5832 16071.89,5896.51 U1.32
  Bottom Layer w10: R46.2 12950,7100 SW_k1.2@12990,7060
BTL: R47.2 SW_l1.2 U1.31 | length 3330.5
  Top Layer w10: SW_l1.2@13740,7060 SW_l1.2 13806,7002 14280.37,7002 14675.39,6606.98 14675.39,6407.77 15234.16,5849 16000.33,5849 16052.2,5900.87 U1.31
  Bottom Layer w10: R47.2@13700,7365 13700,7100 SW_l1.2@13740,7060
BTM: R58.2 SW_m1.2 U1.44 | length 4471.7
  Top Layer w10: SW_m1.2@12623,6316 12715,6224 14167.54,6224 14169.54,6222 14571.54,6222 15150.61,5642.93 16082.76,5642.93 16308.11,5868.28 U1.44
  Bottom Layer w10: R58.2@12582,6624 R58.2 12582,6357 SW_m1.2@12623,6316
BTN: R57.2 SW_n1.2 U1.45 | length 5254.3
  Top Layer w10: SW_n1.2 11917,6266 12472.21,6266 12531.21,6207 14160.5,6207 14162.5,6205 14564.5,6205 15143.57,5625.93 16089.8,5625.93 16327.8,5863.92 U1.45
  Bottom Layer w10: R57.2@11835,6621 R57.2 11835,6351 SW_n1.2@11873,6313
BTO: R33.2 SW_o1.2 U1.4 | length 3461.3
  Top Layer w10: SW_o1.2 13626,7744 14750.04,7744 14977,7517.04 14977,7108.92 15651.75,6434.17 U1.4
  Bottom Layer w10: R33.2@13510,8115 13510,7850 SW_o1.2@13550,7810
BTP: R34.2 SW_p1.2 U1.3 | length 2713.2
  Top Layer w10: SW_p1.2@14300,7810 SW_p1.2 14359,7761 14757.08,7761 14994,7524.08 14994,7115.96 15656.11,6453.85 U1.3
  Bottom Layer w10: R34.2 14260,7850 SW_p1.2@14300,7810
BTQ: R25.2 SW_q1.2 U1.26 | length 9776.7
  Top Layer w10: SW_q1.2 7770,7590 13874.67,7590 14181,7283.67 14181,7149.46 14479.46,6851 15016.04,6851 15262,6605.04 15262,6262.71 15521.83,6002.87 15917.13,6002.87 15953.78,5966.22 U1.26
  Bottom Layer w10: R25.2@7510,8115 7510,7850 SW_q1.2
BTR: R28.2 SW_r1.2 U1.23 | length 7416.3
  Top Layer w10: SW_r1.2@9800,7810 9960,7650 13886.79,7650 14232,7304.79 14232,7170.58 14500.58,6902 15037.17,6902 15313,6626.17 15313,6283.83 15536.68,6060.15 U1.23
  Bottom Layer w10: R28.2@9760,8115 9760,7850 SW_r1.2@9800,7810
BTS: R40.2 SW_s1.2 U1.39 | length 8842.9
  Top Layer w10: SW_s1.2@8490,7060 8667,6883 14231.08,6883 14556.39,6557.69 14556.39,6358.48 15184.87,5730 16049.63,5730 16209.68,5890.06 U1.39
  Bottom Layer w10: R40.2@8450,7365 8450,7100 SW_s1.2@8490,7060
BTSHIFT: R51.2 SW_shift1.2 U1.53 | length 11073.4
  Top Layer w10: SW_shift1.2@6905,6310 7820,6310 7967,6163 10208.08,6163 10434.08,5937 11009.88,5937 11138.88,6066 11640.12,6066 11769.12,5937 12330,5937 12498,6105 14118.25,6105 14120.25,6103 14522.25,6103 15101.32,5523.93 16309.01,5523.93 16628,5842.92 16628,5995.08 16562.93,6060.15 U1.53
  Bottom Layer w10: R51.2 6855,6360 SW_shift1.2@6905,6310
BTSPACE: R65.2 SW_space1.2 U1.57 | length 6758.7
  Top Layer w10: SW_space1.2@11300,5570 12059.17,5570 12525.17,6036 14091.08,6036 14092.08,6035 14494.08,6035 15073.15,5455.93 16337.18,5455.93 16696,5814.75 16696,6023.25 16580.36,6138.89 U1.57
  Bottom Layer w10: R65.2@11260,5871 11260,5610 SW_space1.2@11300,5570
BTT: R29.2 SW_t1.2 U1.18 | length 6625.6
  Top Layer w10: SW_t1.2@10550,7810 10690,7670 13890.83,7670 14249,7311.83 14249,7177.62 14506.62,6920 15043.21,6920 15330,6633.21 15330,6290.88 15462.3,6158.57 U1.18
  Bottom Layer w10: R29.2@10510,8115 10510,7850 SW_t1.2@10550,7810
BTTAB: R24.2 SW_tab1.2 U1.29 | length 10851
  Top Layer w10: SW_tab1.2 7265,7810 7505,7570 13870.63,7570 14164,7276.63 14164,7142.42 14472.42,6834 15009,6834 15245,6598 15245,6255.67 15617.67,5883 15986.25,5883 16012.83,5909.58 U1.29
  Bottom Layer w10: R24.2@6580,8115 6580,7850 SW_tab1.2
BTU: R31.2 SW_u1.2 U1.16 | length 5109.2
  Top Layer w10: SW_u1.2@12050,7810 12150,7710 13898.92,7710 14283,7325.92 14283,7191.71 14514.71,6960 15051.29,6960 15364,6647.29 15364,6304.96 15471.01,6197.94 U1.16
  Bottom Layer w10: R31.2@12010,8115 12010,7850 SW_u1.2@12050,7810
BTV: R55.2 SW_v1.2 U1.47 | length 6830.7
  Top Layer w10: SW_v1.2@10373,6319 10460,6232 12458.12,6232 12517.12,6173 14146.42,6173 14148.42,6171 14550.42,6171 15129.49,5591.93 16103.89,5591.93 16367.17,5855.21 U1.47
  Bottom Layer w10: R55.2@10335,6627 R55.2 10335,6357 SW_v1.2@10373,6319
BTW: R26.2 SW_w1.2 U1.25 | length 8932.6
  Top Layer w10: SW_w1.2@8300,7810 8500,7610 13878.71,7610 14198,7290.71 14198,7156.5 14486.5,6868 15023.08,6868 15279,6612.08 15279,6269.75 15527.97,6020.78 U1.25
  Bottom Layer w10: R26.2@8260,8115 8260,7850 SW_w1.2@8300,7810
BTWIN: R62.2 SW_win1.2 U1.54 | length 10380.5
  Top Layer w10: SW_win1.2@7830,5560 SW_win1.2 8113,5560 8699,6146 10201.04,6146 10427.04,5920 11016.92,5920 11145.92,6049 11633.08,6049 11762.08,5920 12337.04,5920 12505.04,6088 14111.21,6088 14113.21,6086 14515.21,6086 15094.28,5506.93 16316.05,5506.93 16645,5835.88 16645,6002.12 16567.29,6079.83 U1.54
  Bottom Layer w10: R62.2 7790,5600 SW_win1.2@7830,5560
BTX: R53.2 SW_x1.2 U1.51 | length 8724.1
  Top Layer w10: SW_x1.2@8873,6316 8991,6198 12444.04,6198 12503.04,6139 14132.33,6139 14134.33,6137 14536.33,6137 15115.4,5557.93 16294.93,5557.93 16593,5856 16593,5982 16554.22,6020.78 U1.51
  Bottom Layer w10: R53.2 8835,6354 SW_x1.2@8873,6316
BTY: R30.2 SW_y1.2 U1.17 | length 5867.4
  Top Layer w10: SW_y1.2@11300,7810 11420,7690 13894.88,7690 14266,7318.88 14266,7184.67 14510.67,6940 15047.25,6940 15347,6640.25 15347,6297.92 15466.66,6178.26 U1.17
  Bottom Layer w10: R30.2 11260,7850 SW_y1.2@11300,7810
BTZ: R52.2 SW_z1.2 U1.52 | length 9539.4
  Top Layer w10: SW_z1.2@8123,6316 8259,6180 12438,6180 12496,6122 14125.29,6122 14127.29,6120 14529.29,6120 15108.36,5540.93 16301.97,5540.93 16611,5849.96 16611,5988.04 16558.58,6040.46 U1.52
  Bottom Layer w10: R52.2 8085,6354 SW_z1.2@8123,6316
D+: R3.2 R4.2 U1.71 | length 666.2
  Top Layer w10: U1.71 16734.52,6414.48 16764.04,6444 16890,6444 16934,6400 R3.2
D-: R2.2 U1.70 | length 704.9
  Top Layer w10: U1.70 16738.88,6394.8 16771.08,6427 16882.96,6427 16946.96,6363 17031,6363 17094,6300 R2.2 R2.2@17122.8,6297.8
GND: "SW_\"1.1" C1.1 C2.1 C3.1 C4.1 C5.1 C6.1 C7.1 C8.1 C9.2 C10.2 C11.2 C12.1 D1.2 D2.2 P12.0 P12.6 P13.4 R1.2 R6.1 SW1.1 SW2.1 SW3.1 SW4.1 SW5.1 SW6.1 SW7.1 SW8.1 SW9.1 SW10.1 SW_,1.1 SW_-1.1 SW_.1.1 SW_/1.1 SW_;1.1 SW_=1.1 SW_[1.1 SW_\1.1 SW_]1.1 SW_`1.1 SW_a1.1 SW_alt1.1 SW_altright1.1 SW_b1.1 SW_bak1.1 SW_c1.1 SW_cfg1.1 SW_ctrl1.1 SW_d1.1 SW_e1.1 SW_enter1.1 SW_esc1.1 SW_f1.1 SW_fn1.1 SW_g1.1 SW_h1.1 SW_i1.1 SW_j1.1 SW_k1.1 SW_l1.1 SW_m1.1 SW_n1.1 SW_o1.1 SW_p1.1 SW_q1.1 SW_r1.1 SW_s1.1 SW_shift1.1 SW_space1.1 SW_t1.1 SW_tab1.1 SW_u1.1 SW_v1.1 SW_w1.1 SW_win1.1 SW_x1.1 SW_y1.1 SW_z1.1 U1.10 U1.19 U1.20 U1.27 U1.49 U1.74 U1.99 U2.1 USB1.5 USB1.6 | length 860.5
  Top Layer w10: v1(15790,6117) v1@15792.2,6119.2 ; 15810.94,6316.06 U1.10 ; v1(15860,6647) 15955,6647 15973.46,6628.54 U1.99 ; v1(15885,5925) v1@15898,5925 ; U1.20 v1@15792.2,6119.2 ; U1.19 15811.89,6138.89 v1@15792.2,6119.2 ; v1@15900,5927 v1@15898,5925 ; U1.27 15973.46,5910.46 15964,5901 15909,5901 15898,5912 v1@15898,5925 ; U1.49 16406.54,5900.46 v5@16430,5877 ; U1.74 16553.54,6473.54 16569,6489 v1(16611,6489)
  other v1: 17007,5844 15759,5928 16090,6137 17211,6147 16080,6327 15792,6333 16300,6447 17130,6610 16512,6663 17050,6690 15624,6750 16554,6750 15850,6780 16380,6910
  other v4: 11667,6123 16833,6492 15435,6549 16140,6807 16065,7095
  other v5: 16440,5870
NetC7_2: C7.2 U1.12 Y1.1 | length 512.9
  Top Layer w10: Y1.1@15537,6460.5 Y1.1 15720.82,6276.69 U1.12
  Bottom Layer w10: C7.2 Y1.1@15540,6456
NetC8_2: C8.2 U1.13 Y1.2 | length 436.1
  Top Layer w10: Y1.2 15545.47,6257 U1.13
  Bottom Layer w10: C8.2 Y1.2@15537,6261
NetD1_1: D1.1 R7.2 | length 117.8
  Top Layer w10: R7.2 D1.1
NetD2_1: D2.1 R8.2
  other v2: 17130,5811
NetP13_2: P13.2 R2.1 USB1.2 | length 3108.9
  Top Layer w10: R2.1 P13.2
  Bottom Layer w10: USB1.2@16624.41,8973.39 USB1.2 16624.41,8626.55 17167,8083.96 17167,6847.96 17275,6739.96 17275,6375 P13.2
NetP13_3: P13.3 R3.1 USB1.3 | length 2998.3
  Top Layer w10: R3.1 P13.3
  Bottom Layer w10: USB1.3@16650,8973.39 USB1.3 16650,8625 17184,8091 17184,6855 17292,6747 17292,6458 P13.3
NetR9_1: R9.1 SW_esc1.4 | length 92.1
  Bottom Layer w10: R9.1@6390,8955 6395,8960 SW_esc1.4
NetR10_1: R10.1 SW1.4 | length 90
  Bottom Layer w10: R10.1@7140,8960 SW1.4@7230,8960
NetR11_1: R11.1 SW2.4 | length 85
  Bottom Layer w10: R11.1@7895,8960 SW2.4@7980,8960
NetR12_1: R12.1 SW3.4 | length 85
  Bottom Layer w10: R12.1@8645,8960 SW3.4@8730,8960
NetR13_1: R13.1 SW4.4 | length 85
  Bottom Layer w10: R13.1@9395,8960 SW4.4@9480,8960
NetR14_1: R14.1 SW5.4 | length 85
  Bottom Layer w10: R14.1@10145,8960 SW5.4@10230,8960
NetR15_1: R15.1 SW6.4 | length 85
  Bottom Layer w10: R15.1@10895,8960 SW6.4@10980,8960
NetR16_1: R16.1 SW7.4 | length 85
  Bottom Layer w10: R16.1@11645,8960 SW7.4@11730,8960
NetR17_1: R17.1 SW8.4 | length 85
  Bottom Layer w10: R17.1@12395,8960 SW8.4@12480,8960
NetR18_1: R18.1 SW9.4 | length 85
  Bottom Layer w10: R18.1@13145,8960 SW9.4@13230,8960
NetR19_1: R19.1 SW10.4 | length 85
  Bottom Layer w10: R19.1@13895,8960 SW10.4@13980,8960
NetR20_1: R20.1 SW_-1.4 | length 85
  Bottom Layer w10: R20.1@14645,8960 SW_-1.4@14730,8960
NetR21_1: R21.1 SW_=1.4 | length 85
  Bottom Layer w10: R21.1@15395,8960 SW_=1.4
NetR22_1: R22.1 SW_\1.4 | length 85
  Bottom Layer w10: R22.1@16145,8960 SW_\1.4
NetR23_2: R23.2 SW_`1.4 | length 92.1
  Bottom Layer w10: R23.2@16890,8955 16895,8960 SW_`1.4
NetR24_1: R24.1 SW_tab1.4 | length 85
  Bottom Layer w10: R24.1@6585,8210 SW_tab1.4
NetR25_1: R25.1 SW_q1.4 | length 91
  Bottom Layer w10: R25.1@7509,8210 SW_q1.4
NetR26_1: R26.1 SW_w1.4 | length 85
  Bottom Layer w10: R26.1@8265,8210 SW_w1.4@8350,8210
NetR27_1: R27.1 SW_e1.4 | length 85
  Bottom Layer w10: R27.1@9015,8210 SW_e1.4@9100,8210
NetR28_1: R28.1 SW_r1.4 | length 85
  Bottom Layer w10: R28.1@9765,8210 SW_r1.4@9850,8210
NetR29_1: R29.1 SW_t1.4 | length 85
  Bottom Layer w10: R29.1@10515,8210 SW_t1.4@10600,8210
NetR30_1: R30.1 SW_y1.4 | length 85
  Bottom Layer w10: R30.1@11265,8210 SW_y1.4@11350,8210
NetR31_1: R31.1 SW_u1.4 | length 85
  Bottom Layer w10: R31.1@12015,8210 SW_u1.4@12100,8210
NetR32_1: R32.1 SW_i1.4 | length 85
  Bottom Layer w10: R32.1@12765,8210 SW_i1.4@12850,8210
NetR33_1: R33.1 SW_o1.4 | length 85
  Bottom Layer w10: R33.1@13515,8210 SW_o1.4@13600,8210
NetR34_1: R34.1 SW_p1.4 | length 85
  Bottom Layer w10: R34.1@14265,8210 SW_p1.4@14350,8210
NetR35_1: R35.1 SW_[1.4 | length 85
  Bottom Layer w10: R35.1@15015,8210 SW_[1.4@15100,8210
NetR36_1: R36.1 SW_]1.4 | length 85
  Bottom Layer w10: R36.1@15765,8210 SW_]1.4@15850,8210
NetR37_1: R37.1 SW_bak1.4 | length 85
  Bottom Layer w10: R37.1@16705,8210 SW_bak1.4
NetR38_1: R38.1 SW_ctrl1.4 | length 85
  Bottom Layer w10: R38.1@6675,7460 SW_ctrl1.4@6760,7460
NetR39_1: R39.1 SW_a1.4 | length 85
  Bottom Layer w10: R39.1@7705,7460 SW_a1.4@7790,7460
NetR40_1: R40.1 SW_s1.4 | length 85
  Bottom Layer w10: R40.1@8455,7460 SW_s1.4@8540,7460
NetR41_1: R41.1 SW_d1.4 | length 85
  Bottom Layer w10: R41.1@9205,7460 SW_d1.4@9290,7460
NetR42_1: R42.1 SW_f1.4 | length 85
  Bottom Layer w10: R42.1@9955,7460 SW_f1.4@10040,7460
NetR43_1: R43.1 SW_g1.4 | length 85
  Bottom Layer w10: R43.1@10705,7460 SW_g1.4@10790,7460
NetR44_1: R44.1 SW_h1.4 | length 85
  Bottom Layer w10: R44.1@11455,7460 SW_h1.4@11540,7460
NetR45_1: R45.1 SW_j1.4 | length 85
  Bottom Layer w10: R45.1@12205,7460 SW_j1.4@12290,7460
NetR46_1: R46.1 SW_k1.4 | length 85
  Bottom Layer w10: R46.1@12955,7460 SW_k1.4@13040,7460
NetR47_1: R47.1 SW_l1.4 | length 89
  Bottom Layer w10: R47.1@13701,7460 SW_l1.4@13790,7460
NetR48_1: R48.1 SW_;1.4 | length 85
  Bottom Layer w10: R48.1@14455,7460 14540,7460
NetR49_1: "SW_\"1.4" R49.1 | length 85
  Bottom Layer w10: R49.1@15205,7460 15290,7460
NetR50_1: R50.1 SW_enter1.4 | length 85
  Bottom Layer w10: R50.1@16425,7460 SW_enter1.4@16510,7460
NetR51_1: R51.1 SW_shift1.4 | length 100.8
  Bottom Layer w20: R51.1 6953,6708 SW_shift1.4@6955,6710
NetR52_1: R52.1 SW_z1.4 | length 90.1
  Bottom Layer w10: R52.1 8168,6711 SW_z1.4@8173,6716
NetR53_1: R53.1 SW_x1.4 | length 90.1
  Bottom Layer w10: R53.1 8918,6711 SW_x1.4@8923,6716
NetR54_1: R54.1 SW_c1.4 | length 90.1
  Bottom Layer w10: R54.1 9668,6711 SW_c1.4@9673,6716
NetR55_1: R55.1 SW_v1.4 | length 96.3
  Bottom Layer w10: R55.1@10335,6717 10344,6708 10412,6708 SW_v1.4@10423,6719
NetR56_1: R56.1 SW_b1.4 | length 90.8
  Bottom Layer w10: R56.1@11088,6714 11094,6708 11165,6708 SW_b1.4@11173,6716
NetR57_1: R57.1 SW_n1.4 | length 93.8
  Bottom Layer w10: R57.1@11835,6711 11841,6705 11915,6705 SW_n1.4@11923,6713
NetR58_1: R58.1 SW_m1.4 | length 96.8
  Bottom Layer w10: R58.1@12582,6714 12588,6708 12665,6708 SW_m1.4@12673,6716
NetR59_1: R59.1 SW_,1.4 | length 96.8
  Bottom Layer w10: R59.1@13332,6714 13338,6708 13415,6708 13423,6716
NetR60_1: R60.1 SW_.1.4 | length 96.8
  Bottom Layer w20: R60.1@14082,6714 14088,6708 14165,6708 SW_.1.4@14173,6716
NetR61_1: R61.1 SW_/1.4 | length 97.4
  Bottom Layer w20: R61.1@14823,6714 14824,6713 SW_/1.4@14920,6713
NetR62_1: R62.1 SW_win1.4 | length 85
  Bottom Layer w10: R62.1@7795,5960 SW_win1.4@7880,5960
NetR63_1: R63.1 SW_alt1.4 | length 85
  Bottom Layer w10: R63.1@8735,5960 SW_alt1.4@8820,5960
NetR64_1: R64.1 SW_fn1.4 | length 85
  Bottom Layer w10: R64.1@9675,5960 SW_fn1.4@9760,5960
NetR65_1: R65.1 SW_space1.4 | length 97
  Bottom Layer w10: R65.1 SW_space1.4@11359,5961
NetR66_1: R66.1 SW_altright1.4 | length 101.1
  Bottom Layer w10: R66.1@12855,5970 12865,5960 SW_altright1.4
NetR67_1: R67.1 SW_cfg1.4 | length 93
  Bottom Layer w10: R67.1@13795,5960 SW_cfg1.4
PA8: C10.1 R4.1 U1.67 | length 717.3
  Top Layer w10: U1.67@16489.21,6335 16984,6335 17126.5,6192.5 C10.1@17126.5,6171.5
PA9: P12.1 U1.68 | length 634.6
  Top Layer w10: U1.68 16819.43,6355.43 16854,6390 v2(16854,6393) ; P12.1 16964.94,6586.8 16959,6580.86 v2(16959,6492)
  Bottom Layer w10: v2(16854,6393) 16860,6393 v2(16959,6492)
PA10: P12.2 U1.69 | length 578.8
  Top Layer w10: U1.69 16788.11,6375.11 16806,6393 v2(16806,6396) ; v2(16908,6495) 16908,6498 16919.06,6509.06 P12.2 P12.2@16919.06,6599.06
  Bottom Layer w10: v2(16806,6396) 16905,6495 v2(16908,6495)
PC6: U1.63
PC7: U1.64
PC8: U1.65
PC9: U1.66
PD13: R7.1 U1.60 | length 783.9
  Top Layer w10: U1.60 16593.43,6197.94 16747,6044.37 16747,5795 16851,5691 R7.1
PD14: U1.61
PD15: U1.62
RESET#: C9.1 R5.2 U1.14 | length 1024.2
  Top Layer w10: U1.14 15891.1,6237 v2(16370,6237) ; v2(16626,6237) 16620,6237 v2(16820,6037)
  Bottom Layer w10: v2(16370,6237) v2(16626,6237)
SWCLK: P12.5 U1.76 | length 400.3
  Top Layer w10: U1.76@16428,6549 16772,6549 16800.94,6577.94 P12.5
SWDIO: P12.4 U1.72 | length 448.7
  Top Layer w10: U1.72 16712.17,6434.17 16840,6562 P12.4@16840,6607
TDI: U1.77
TDO/SWO: U1.89
TRST: U1.90
V5: C11.1 P13.1 U2.3 USB1.1 | length 3767.4
  Bottom Layer w20: USB1.1@16598.82,8973.39 USB1.1 16598.82,8621.03 17145,8074.85 17145,6837 ; U2.3 16717.42,6836 17144,6836 17145,6837 ; C11.1 17290,6200 ; P13.1 17290,6200 ; 17145,6837 17253,6729 17253,6237 17290,6200
V33: "SW_\"1.3" C1.2 C2.2 C3.2 C4.2 C5.2 C6.2 C12.2 P11.2 P12.3 R5.1 R8.1 SW1.3 SW2.3 SW3.3 SW4.3 SW5.3 SW6.3 SW7.3 SW8.3 SW9.3 SW10.3 SW_,1.3 SW_-1.3 SW_.1.3 SW_/1.3 SW_;1.3 SW_=1.3 SW_[1.3 SW_\1.3 SW_]1.3 SW_`1.3 SW_a1.3 SW_alt1.3 SW_altright1.3 SW_b1.3 SW_bak1.3 SW_c1.3 SW_cfg1.3 SW_ctrl1.3 SW_d1.3 SW_e1.3 SW_enter1.3 SW_esc1.3 SW_f1.3 SW_fn1.3 SW_g1.3 SW_h1.3 SW_i1.3 SW_j1.3 SW_k1.3 SW_l1.3 SW_m1.3 SW_n1.3 SW_o1.3 SW_p1.3 SW_q1.3 SW_r1.3 SW_s1.3 SW_shift1.3 SW_space1.3 SW_t1.3 SW_tab1.3 SW_u1.3 SW_v1.3 SW_w1.3 SW_win1.3 SW_x1.3 SW_y1.3 SW_z1.3 U1.6 U1.11 U1.21 U1.22 U1.28 U1.50 U1.75 U1.100 U2.2 U2.4 | length 56587.7
  Top Layer w10: U1.22 15890.79,6090 ; U1.11@15890.79,6295.74 U1.11 v2(15979.37,6296.37) ; U1.6 15979.37,6394.8 ; U1.100 15953.78,6503.22 v2(15980,6477) ; U1.28 v2(15993.15,6033) 15996.15,6036 16077,6036 16125,6084 16215,6084 16262,6037 v2(16400,6037) ; U1.50 16426.22,6010.78 v2(16400,6037) ; U1.75 16426.22,6493.22 v2(16410,6477) 16410,6047 v2(16400,6037)
  Top Layer w20: 15890.79,6090 v2(15978,6090) 15979,6090 15979,6047.15 v2(15993.15,6033) ; v2(15979.37,6296.37) 15979.37,6394.8 15979.37,6476.37 v2(15980,6477) ; SW_\1.3 16840,8960 16938,8862 16982,8862 SW_`1.3 ; P12.3@16879.68,6610.32 v1(16880,6660)
  Bottom Layer w10: C5.2 16485,5952 R5.1 P11.2 17079,5952 R8.1
  Bottom Layer w20: SW_esc1.3 6660,9040 7335,9040 ; SW_tab1.3 6850,8290 7700,8290 ; SW_ctrl1.3@6860,7460 6940,7540 7890,7540 ; SW_shift1.3@7055,6699 7064,6708 7545,6708 7627,6790 8274,6790 ; SW1.3 7334,9039 7335,9040 ; SW_q1.3 7700,8290 ; SW_a1.3@7890,7460 7890,7540 ; SW_win1.3@7980,5960 SW_win1.3 7991,5960 8071,6040 8931,6040 ; SW2.3@8080,8960 8080,9040 ; SW_z1.3 8273,6789 8274,6790 ; SW_w1.3@8450,8210 8460,8220 8460,8290 ; SW_s1.3@8643,7460 8643,7539 ; SW3.3@8833,8960 8833,9036 ; SW_alt1.3@8920,5960 8931,5971 8931,6040 ; SW_x1.3@9021,6710 9021,6790 ; SW_e1.3@9200,8210 9210,8220 9210,8290 ; SW_d1.3@9390,7460 9396,7466 9396,7540 ; SW4.3@9580,8960 9580,9040 ; SW_c1.3@9771,6710 9771,6790 ; SW_fn1.3@9860,5960 9867,5967 9867,6040 ; SW_r1.3@9959,8210 9959,8290 ; SW_f1.3@10140,7460 10146,7466 10146,7540 ; SW5.3@10333,8960 10333,9030 ; SW_v1.3@10521,6720 10521,6790 ; SW_t1.3@10700,8210 10710,8220 10710,8290 ; SW_g1.3@10899,7460 10899,7539 ; SW6.3@11080,8960 11080,9040 ; SW_b1.3@11274,6710 11274,6790 ; SW_y1.3@11450,8210 11460,8220 11460,8290 ; SW_h1.3@11640,7460 11640,7540 ; SW7.3@11830,8960 11830,9040 ; SW_n1.3@12021,6710 12021,6790 ; SW_u1.3@12209,8210 12209,8290 ; SW_j1.3@12390,7460 12390,7540 ; SW8.3@12583,8960 12583,9036 ; SW_m1.3@12772,6710 12772,6790 ; SW_i1.3@12950,8210 12960,8220 12960,8290 ; SW_altright1.3@13050,5960 13050,6040 ; SW_k1.3@13146,7460 13146,7540 ; SW9.3@13333,8960 13333,9040 ; 13524,6710 13524,6790 ; SW_o1.3@13700,8210 13700,8290 ; SW_l1.3@13890,7460 13899,7469 13899,7540 ; SW_cfg1.3@13984,5956 13984,5966 13910,6040 ; SW10.3@14080,8960 14080,9040 ; SW_.1.3 14273,6790 ; SW_p1.3@14450,8210 14450,8280 14460,8290 ; 14649,7460 14649,7540 ; SW_-1.3@14830,8960 14830,9030 14840,9040 ; SW_/1.3 15020,6790 ; SW_[1.3@15200,8210 15210,8220 15210,8290 ; SW_=1.3 15580,9040 ; SW_]1.3@15950,8210 15960,8220 15960,8290 ; v2(15978,6090) C4.2@15979,6090 ; v2(15979.37,6296.37) 15979.37,6121.63 15987,6114 C4.2 ; v2(16410,6477) 16425,6477 16518,6570 16560,6570 U2.4@16567.13,6577.13 ; C12.2 16519,6588 16609.13,6588 U2.4 ; 16497.73,7413 15437,7413 15310,7540 15021,7540 ; 16497.73,7413.47 16570.47,7413.47 SW_enter1.3 ; U2.2@16620,6852 U2.2 U2.4 ; SW_enter1.3@16645,7460 SW_enter1.3 ; v1(16880,6660) 16797.13,6577.13 U2.4 ; SW_bak1.3 16810,8290 16570,8290 ; 7335,9040 8080,9040 ; 7700,8290 8460,8290 ; 7890,7540 9396,7540 ; 8080,9040 9580,9040 ; 8274,6790 9021,6790 ; 8460,8290 9210,8290 ; 8931,6040 9867,6040 ; 9021,6790 9771,6790 ; 9210,8290 9959,8290 ; 9396,7540 10146,7540 ; 9580,9040 11080,9040 ; 9771,6790 10521,6790 ; 9867,6040 10307,6040 10428,5919 11016,5919 11147,6050 11368,6050 11457,5961 12402,5961 12481,6040 13050,6040 ; 9959,8290 10710,8290 ; 10146,7540 11640,7540 ; 10521,6790 11274,6790 ; 10710,8290 11460,8290 ; 11080,9040 11830,9040 ; 11274,6790 12021,6790 ; 11460,8290 12209,8290 ; 11640,7540 12390,7540 ; 11830,9040 13333,9040 ; 12021,6790 12772,6790 ; 12209,8290 12960,8290 ; 12390,7540 13146,7540 ; 12772,6790 13524,6790 ; 12960,8290 13700,8290 ; 13050,6040 13910,6040 ; 13146,7540 13899,7540 ; 13333,9040 14080,9040 ; 13524,6790 13911,6790 ; 13700,8290 14460,8290 ; 13899,7540 14649,7540 ; 13910,6040 13910,6789 13911,6790 ; 13911,6790 14273,6790 ; 14080,9040 14840,9040 ; 14273,6790 15020,6790 ; 14460,8290 15210,8290 ; 14649,7540 15021,7540 ; 14840,9040 15580,9040 ; 15020,6790 15020,7539 15021,7540 ; 15210,8290 15960,8290 ; 15580,9040 16250,9040 SW_\1.3 16420,8960 16570,8810 16570,8290 ; 15960,8290 16570,8290 ; C4.2@15979,6090 15989,6090 15993,6094 C4.2 ; C4.2@15979,6090 15980,6091 C4.2 ; 16570,8290 16570,7508 16617,7461 SW_enter1.3
  Bottom Layer w30: U2.2@16620,6852 16840,7072 16840,7304 16684,7460 SW_enter1.3@16645,7460
pads on no net: "SW_\"1." P1.0 P1.1 P1.3 P1.4 P9.0 P9.1 P9.3 P9.4 P10.0 P10.1 P10.3 P10.4 P14.0 P14.1 P14.3 P14.4 SW1. SW2. SW3. SW4. SW5. SW6. SW7. SW8. SW9. SW10. SW_,1. SW_-1. SW_.1. SW_/1. SW_;1. SW_=1. SW_[1. SW_\1. SW_]1. SW_`1. SW_a1. SW_alt1. SW_altright1. SW_b1. SW_bak1. SW_c1. SW_cfg1. SW_ctrl1. SW_d1. SW_e1. SW_enter1. SW_esc1. SW_f1. SW_fn1. SW_g1. SW_h1. SW_i1. SW_j1. SW_k1. SW_l1. SW_m1. SW_n1. SW_o1. SW_p1. SW_q1. SW_r1. SW_s1. SW_shift1. SW_space1. SW_t1. SW_tab1. SW_u1. SW_v1. SW_w1. SW_win1. SW_x1. SW_y1. SW_z1. U1.7 U1.8 U1.9 U1.73 USB1. USB1.4
copper on no net:
  other v3: 6250,5500 17300,5500 6270,6900 17290,6900 11210,7260 7164,8028 16410,8030 6250,8350 17300,8350

## Polygon pours and split planes (outlines as drawn)
GND on Bottom Layer "GND_L02_P033" (solid, remove dead copper, pour order 33): 6154.04,5540 6154.04,9042.15 cw(c6250,9042.15) 6250,9138.1 17300,9138.1 cw(c17300,9034) 17404.1,9034 17404.1,5500 cw(c17302.05,5502.05) 17300,5400 6300,5400 cw(c6297.02,5542.98)
GND on Top Layer "GND_L01_P032" (solid, remove dead copper, pour order 32): 6154.04,5540 6154.04,9042.15 cw(c6250,9042.15) 6250,9138.1 17300,9138.1 cw(c17300,9034) 17404.1,9034 17404.1,5500 cw(c17302.05,5502.05) 17300,5400 6300,5400 cw(c6297.02,5542.98)

## Keep-outs
Keep-Out Layer:
  the board outline again, w5

## Silkscreen, mask and mechanical layers (free items; w line width, h text height)
Top Overlay:
  drawing of 2105 lines, arcs and shapes, not listed
  text "G" at 17250,6480 h40
  text "+" at 17250,6380 h40
  text "-" at 17250,6280 h40
  text "V5" at 17220,6180 h40
  text "2017-04-18 BJTU YZ" at 15350,5630 h80
  text "Mod BY edashao" at 16206,5565 h40
Mechanical 1:
  drawing of 1483 lines, arcs and shapes, not listed

## Text inside footprints (layer, text, board x,y; h text height)
USB1: Bottom Overlay "+" at 16520.08,8967.48 h39.37 r180